# EAGLE board schematic (EAGLE 9.5.1)
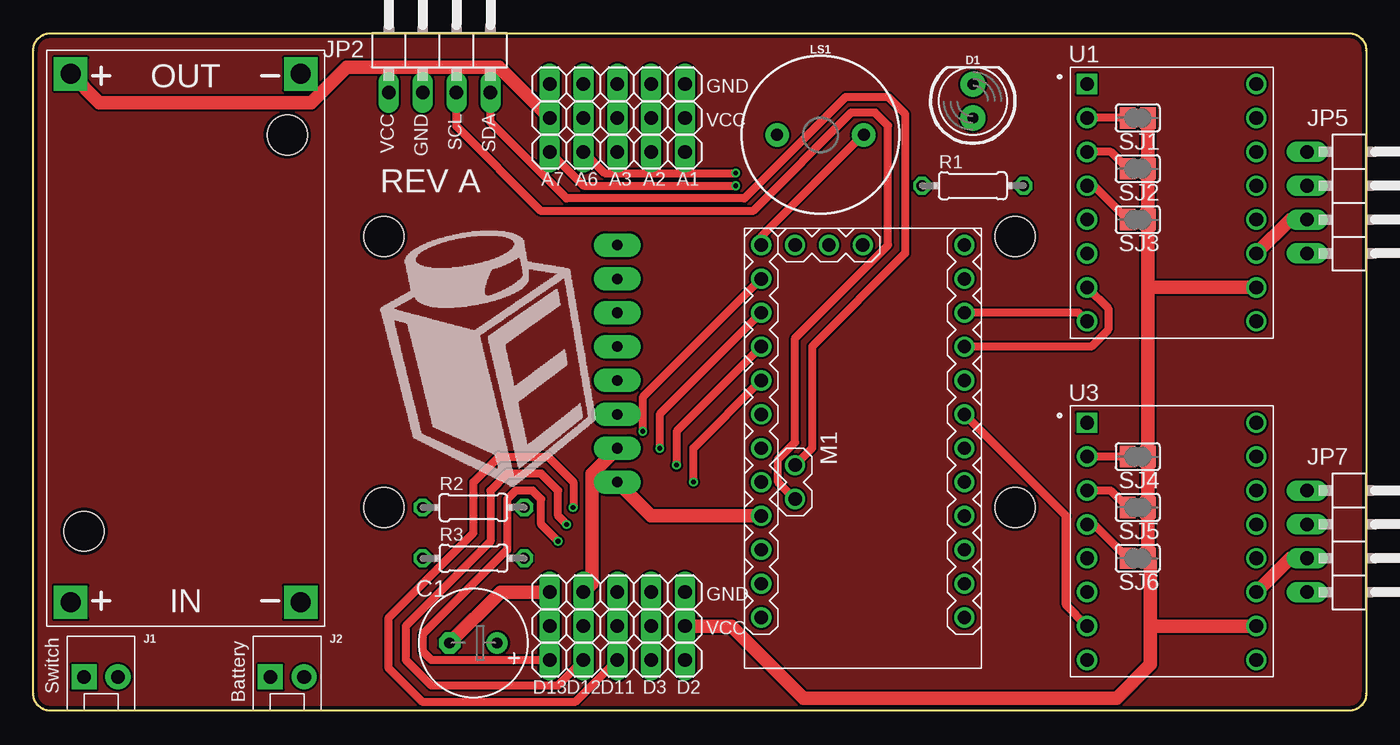
[diagram p0: board, top side]
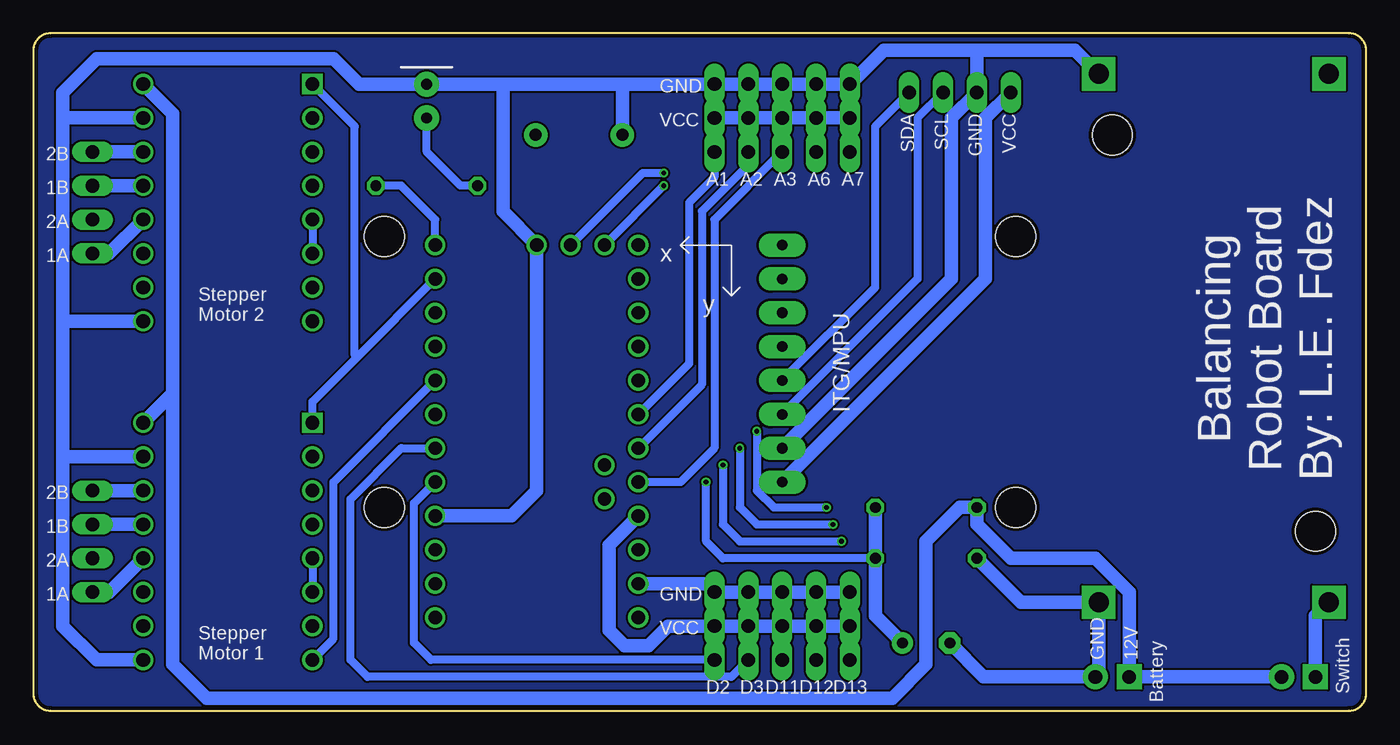
[diagram p1: board, bottom side, seen from below]

Size 100 x 50.8 mm. Coordinates in mm from the lower left corner, seen from the top.
Outline: 98.73,0 1.27,0 arc-90 0,1.27 0,49.53 arc-90 1.27,50.8 98.73,50.8 arc-90 100,49.53 100,1.27 arc-90 98.73,0
Copper layers (1*16): Top 0.035mm / dielectric 1.5mm / Bottom 0.035mm
Design rules "SeeedStudio_2layer_DRU_no_angle_20140221 *": minimum track width 6mil, minimum drill 12mil, track to track 6mil, track to pad 6mil, pad to pad 6mil, via to via 6mil, smd to smd 0mil, copper to edge 10mil, drill to drill 10mil, minimum pad ring 10mil, minimum via ring 6mil, stop-mask expansion 2mil, vias tented up to drill 100mil, thermal gap 10mil
Holes 3 mm at 26.29,35.56 73.66,35.56 26.29,15.24 73.66,15.24

## Footprints (pad centres in the part's own frame; a part is rotated, then mirrored left to right if it is on the bottom)
E3,5-8 = drill 0.813 pad 1.6: + -1.778,0 | drill 0.813 pad 1.6 octagon: - 1.778,0
LED_5MM = drill 0.813 pad 1.88: A -1.27,0; K 1.27,0
MOLEX-1X2 = drill 1.016 pad 1.88 square: 1 0,0 | drill 1.016 pad 1.88: 2 2.54,0
1X05 = drill 1.016 long: 1 -5.08,0; 2 -2.54,0; 3 0,0; 4 2.54,0; 5 5.08,0
1X04/90 = drill 1.016 long: 1 -3.81,-3.81; 2 -1.27,-3.81; 3 1.27,-3.81; 4 3.81,-3.81
BUZZER-12MM = drill 0.9 pad 1.778: + 3.25,0; - -3.25,0
ARDUINO-PRO-MINI#NP = drill 1: J2.1 -1.27,5.08; J2.2 -3.81,5.08; J3.1 15.24,0; J3.2 15.24,2.54; J3.3 15.24,5.08; J6.1 -12.7,7.62; J6.2 -10.16,7.62; J6.3 -7.62,7.62; J6.4 -5.08,7.62; J6.5 -2.54,7.62; J6.6 0,7.62; J6.7 2.54,7.62; J6.8 5.08,7.62; J6.9 7.62,7.62; J6.10 10.16,7.62; J6.11 12.7,7.62; J6.12 15.24,7.62; J7.1 15.24,-7.62; J7.2 12.7,-7.62; J7.3 10.16,-7.62; J7.4 7.62,-7.62; J7.5 5.08,-7.62; J7.6 2.54,-7.62; J7.7 0,-7.62; J7.8 -2.54,-7.62; J7.9 -5.08,-7.62; J7.10 -7.62,-7.62; J7.11 -10.16,-7.62; J7.12 -12.7,-7.62
0204/7 = drill 0.813 octagon: 1 -3.81,0; 2 3.81,0
SJ = smd 1.168 x 1.6: 1 -0.762,0; 2 0.762,0
MODULE_A4988_STEPPER_MOTOR_DRIVER_CARRIER = drill 1.02 square: 1 -6.35,8.89 | drill 1.02: 2 -6.35,6.35; 3 -6.35,3.81; 4 -6.35,1.27; 5 -6.35,-1.27; 6 -6.35,-3.81; 7 -6.35,-6.35; 8 -6.35,-8.89; 9 6.35,-8.89; 10 6.35,-6.35; 11 6.35,-3.81; 12 6.35,-1.27; 13 6.35,1.27; 14 6.35,3.81; 15 6.35,6.35; 16 6.35,8.89
GY-521 = drill 0.8 pad 1.778 long: ADO -8.89,-6.35; GND -8.89,6.35; INT -8.89,-8.89; SCL -8.89,3.81; SDA -8.89,1.27; VCC -8.89,8.89; XCL -8.89,-3.81; XDA -8.89,-1.27
DC-DC-STEP-DOWN-LM2596 = drill 1.5 pad 2.5 square: IN+ -19.812,8.636; IN- -19.812,-8.636; OUT+ 19.812,8.636; OUT- 19.812,-8.636 | hole 3: -14.478,7.62; 15.24,-7.62

## Placement (x,y rotation side)
C1  [E3,5-8]  33.02,5.08 180 top
D1  [LED_5MM]  70.48,45.72 90 top
J1  [MOLEX-1X2]  3.81,2.54 0 top
J2  [MOLEX-1X2]  17.78,2.54 0 top
JP1  [1X05]  43.81,46.99 180 top
JP2  [1X04/90]  30.48,50.16 0 top
JP3  [1X05]  43.81,41.91 180 top
JP4  [1X05]  43.81,44.45 180 top
JP5  [1X04/90]  99.38,38.1 270 top
JP7  [1X04/90]  99.38,12.7 270 top
JP8  [1X05]  43.81,8.89 180 top
JP9  [1X05]  43.81,6.35 180 top
JP10  [1X05]  43.81,3.81 180 top
LS1  BUZZER-PTH  [BUZZER-12MM]  59.05,43.18 0 top
M1  ARDUINO-PRO-MINI-3.3V#NP  [ARDUINO-PRO-MINI#NP]  62.23,19.68 90 top
R1  [0204/7]  70.48,39.37 180 top
R2  [0204/7]  33.02,15.24 0 top
R3  [0204/7]  33.02,11.43 180 top
SJ1  [SJ]  82.87,44.45 180 top
SJ2  [SJ]  82.87,40.64 180 top
SJ3  [SJ]  82.87,36.83 180 top
SJ4  [SJ]  82.87,19.05 180 top
SJ5  [SJ]  82.87,15.24 180 top
SJ6  [SJ]  82.87,11.43 180 top
U1  A4988 STEPPER DRIVER  [MODULE_A4988_STEPPER_MOTOR_DRIVER_CARRIER]  85.41,38.1 0 top
U2  GY-521MPU6050  [GY-521]  52.7,26.04 180 bottom
U3  A4988 STEPPER DRIVER  [MODULE_A4988_STEPPER_MOTOR_DRIVER_CARRIER]  85.41,12.7 0 top
U$1  DC-DC-STEP-DOWN-LM2596  [DC-DC-STEP-DOWN-LM2596]  11.43,27.94 90 top

## Library data of the parts
C1 R1-R3 = resistor
D1 = SparkFun-LED
J1 J2 = SparkFun-Connectors; SF_ID: PRT-09918
JP1-JP5 JP7-JP10 = pinhead
LS1 = SparkFun-Electromechanical; PROD_ID: COMP-08253; SF_SKU: COM-07950
M1 U$1 = diy-modules
SJ1-SJ6 = jumper
U1 U3 = A4988_STEPPER_MOTOR_DRIVER_CARRIER; AVAILABILITY: Unavailable; DESCRIPTION: Stepper motor controler; IC: A4988; 1A; Uin mot: 8÷35V; MF: Pololu; MP: A4988 STEPPER MOTOR DRIVER CARRIER; PACKAGE: None; PRICE: None
U2 = gy-521

## Nets
5V: JP2.1 JP4.1 JP4.2 JP4.3 JP4.4 JP4.5 JP9.1 JP9.2 JP9.3 JP9.4 JP9.5 M1.J6.4 SJ1.1 SJ2.1 SJ3.1 SJ4.1 SJ5.1 SJ6.1 U1.10 U2.VCC U3.10 U$1.OUT+
12V: J1.2 J2.1 R2.1 U1.16 U3.16
A1: JP3.1 M1.J6.7
A2: JP3.2 M1.J6.6
A3: JP3.3 M1.J6.5
A6: JP3.4 M1.J3.2
A7: JP3.5 M1.J3.3
D2: JP10.1 M1.J7.8
D3: JP10.2 M1.J7.7
D11: JP10.3 M1.J6.11
D12: JP10.4 M1.J6.10
D13: JP10.5 M1.J6.9
DIR_1: M1.J7.5 U3.8
DIR_2: M1.J7.3 U1.8
ENA: M1.J7.2 U1.1 U3.1
GND: C1.- D1.K J2.2 JP1.1 JP1.2 JP1.3 JP1.4 JP1.5 JP2.2 JP8.1 JP8.2 JP8.3 JP8.4 JP8.5 LS1.- M1.J3.1 M1.J6.2 M1.J7.9 R3.2 U1.9 U1.15 U2.GND U3.9 U3.15 U$1.IN- U$1.OUT-
N$1: SJ2.2 U1.3
N$2: SJ3.2 U1.4
N$3: SJ1.2 U1.2
N$4: SJ5.2 U3.3
N$5: SJ6.2 U3.4
N$6: SJ4.2 U3.2
N$7: JP5.4 U1.12
N$8: JP5.3 U1.11
N$9: JP7.4 U3.12
N$10: JP7.3 U3.11
N$11: JP7.2 U3.13
N$12: JP7.1 U3.14
N$13: JP5.2 U1.13
N$14: JP5.1 U1.14
N$15: U1.5 U1.6
N$17: J1.1 U$1.IN+
N$18: U3.5 U3.6
N$29: C1.+ M1.J6.8 R2.2 R3.1
N$33: LS1.+ M1.J6.12
N$43: M1.J7.1 R1.1
N$44: D1.A R1.2
RAW: M1.J6.1
SCL: JP2.3 M1.J2.2 U2.SCL
SDA: JP2.4 M1.J2.1 U2.SDA
STEP_1: M1.J7.6 U3.7
STEP_2: M1.J7.4 U1.7

## Tracks (layer width: path | path; a pad name or v marks a point on that pad's centre or on a via)
5V
  Top 1.016: SJ1.1 SJ2.1 SJ3.1 83.63,31.75 | 83.63,31.75 SJ4.1 SJ5.1 SJ6.1 83.82,11.24 83.82,6.35 | U1.10 83.63,31.75 | 83.82,6.35 U3.10 | JP9.1 52.38,6.35 57.78,0.95 81.28,0.95 83.82,3.49 83.82,6.35 | 26.67,48.26 23.5,48.26 20.83,45.59 4.95,45.59 U$1.OUT+ | 26.67,48.26 34.92,48.26 JP4.5 | JP2.1 26.67,48.26 | M1.J6.4 46.35,14.61 U2.VCC
  Bottom 1.016: JP4.5 JP4.4 JP4.3 JP4.2 JP4.1 | JP9.5 JP9.4 JP9.3 JP9.2 JP9.1 52.38,6.35 53.86,4.87 55.65,4.87 56.83,6.04 56.83,12.39 M1.J6.4 | JP2.1 28.57,44.45 28.57,32.38 U2.VCC
12V
  Bottom 1.016: J1.2 J2.1 17.78,8.89 20.32,11.43 26.67,11.43 29.21,13.97 R2.1 30.48,15.24 33.02,12.7 33.02,3.49 35.56,0.95 87,0.95 89.53,3.49 89.53,23.81 | U1.16 89.53,44.77 89.53,23.81 | 89.53,23.81 U3.16
A1
  Bottom 0.61: M1.J6.7 50.8,26.04 50.8,38.1 48.9,40.01 JP3.1
A2
  Bottom 0.61: M1.J6.6 49.85,24.45 49.85,37.47 46.35,40.96 JP3.2
A3
  Bottom 0.61: M1.J6.5 51.44,17.14 48.9,19.68 48.9,36.83 JP3.3
A6  (via drill 0.35)
  Top 0.61: v52.7,40.32 42.86,40.32 JP3.4
  Bottom 0.61: M1.J3.2 54.29,40.32 v52.7,40.32
A7  (via drill 0.35)
  Top 0.61: v52.7,39.37 41.27,39.37 JP3.5
  Bottom 0.61: v52.7,39.37 M1.J3.3
COPPER
  pour Bottom: 100,48 100,1.27 arc-90 98.73,0 1.27,0 arc-90 0,1.27 0,48 0,49.53 arc-90 1.27,50.8 3.81,50.8 98.73,50.8 arc-90 100,49.53
  pour Top: 100,49 100,1.27 arc-90 98.73,0 1.27,0 arc-90 0,1.27 0,49.47 arc-45 0.37,50.37 0.43,50.43 arc-45 1.33,50.8 3.81,50.8 98.73,50.8 arc-90 100,49.53
D2
  Bottom 0.61: M1.J7.8 71.44,15.56 71.44,5.08 70.17,3.81 JP10.1
D3
  Bottom 0.61: JP10.2 47.62,2.54 74.93,2.54 76.2,3.81 76.2,15.88 72.39,19.68 M1.J7.7
D11  (via drill 0.35)
  Top 0.61: M1.J6.11 45.72,23.5 v45.72,20.95 | JP10.3 40.64,0.64 29.21,0.64 26.67,3.17 26.67,6.99 33.02,13.34 33.02,17.14 34.92,19.05 38.61,19.05 40.51,17.14 40.51,15.26 v40.49,15.24
  Bottom 0.61: v45.72,20.95 45.72,16.51 44.45,15.24 41.27,15.24 40.64,15.24 v40.49,15.24
D12  (via drill 0.35)
  Top 0.61: M1.J6.10 46.99,22.23 v46.99,19.68 | v40.01,13.97 39.37,14.61 39.37,16.51 38.1,17.78 35.56,17.78 34.29,16.51 34.29,12.7 27.94,6.35 27.94,3.81 29.84,1.91 39.37,1.91 JP10.4
  Bottom 0.61: v46.99,19.68 46.99,15.24 45.72,13.97 v40.01,13.97
D13  (via drill 0.35)
  Top 0.61: M1.J6.9 48.26,20.95 v48.26,18.41 | v39.37,12.7 38.1,13.97 38.1,15.88 37.47,16.51 36.2,16.51 35.56,15.88 35.56,12.06 29.21,5.71 29.21,4.45 29.84,3.81 JP10.5
  Bottom 0.61: v48.26,18.41 48.26,13.97 46.99,12.7 v39.37,12.7
DIR_1
  Bottom 0.61: M1.J7.5 77.47,17.14 77.47,5.4 U3.8
DIR_2
  Top 0.61: M1.J7.3 78.42,29.84 U1.8
ENA
  Bottom 0.61: 75.72,26.51 79.06,23.18 U3.1 | 75.72,26.51 M1.J7.2 | U1.1 75.88,43.81 75.88,26.67 75.72,26.51
GND
  Top 1.016: C1.- 35.05,8.89 JP8.5 | U2.GND 41.91,17.78 41.91,9.53 JP8.4
  Bottom 1.016: JP8.5 JP8.4 JP8.3 JP8.2 JP8.1 49.53,9.53 M1.J6.2 | C1.- 28.7,2.54 J2.2 20.07,2.79 U$1.IN- 25.91,8.13 R3.2 | U$1.OUT- 21.84,49.53 29.21,49.53 | 29.21,49.53 36.2,49.53 JP1.5 JP1.4 JP1.3 JP1.2 JP1.1 55.88,46.99 | 55.88,46.99 64.77,46.99 | 64.77,46.99 D1.K 75.56,46.99 77.47,48.9 95.25,48.9 97.79,46.35 97.79,44.45 | LS1.- 55.8,46.91 55.88,46.99 | U3.9 95.25,3.81 97.79,6.35 97.79,19.05 | 97.79,19.05 97.79,29.21 | 97.79,29.21 97.79,44.45 | 97.79,44.45 U1.15 | U3.15 97.79,19.05 | U1.9 97.79,29.21 | 64.77,46.99 64.77,37.47 M1.J3.1 62.23,16.51 64.14,14.61 M1.J7.9 | U2.GND 31.11,32.38 31.11,44.45 JP2.2 29.21,49.53
N$1
  Top 0.61: SJ2.2 80.83,41.91 U1.3
N$2
  Top 0.61: SJ3.2 79.57,39.37 U1.4
N$3
  Top 0.61: SJ1.2 U1.2
N$4
  Top 0.61: SJ5.2 80.83,16.51 U3.3
N$5
  Top 0.61: SJ6.2 79.57,13.97 U3.4
N$6
  Top 0.61: SJ4.2 U3.2
N$7
  Bottom 1.016: JP5.4 94.3,34.29 U1.12
N$8
  Top 1.016: JP5.3 94.3,36.83 U1.11
N$9
  Bottom 1.016: JP7.4 94.3,8.89 U3.12
N$10
  Top 1.016: JP7.3 94.3,11.43 U3.11
N$11
  Bottom 1.016: JP7.2 U3.13
N$12
  Bottom 1.016: U3.14 JP7.1
N$13
  Bottom 1.016: U1.13 JP5.2
N$14
  Bottom 1.016: JP5.1 U1.14
N$15
  Bottom 0.61: U1.5 U1.6
N$17
  Bottom 1.016: U$1.IN+ 3.81,7.11 J1.1
N$18
  Bottom 0.61: U3.5 U3.6
N$29  (via drill 0.35)
  Top 0.61: v49.53,17.14 49.53,19.68 M1.J6.8
  Bottom 0.61: R3.1 48.26,11.43 49.53,12.7 v49.53,17.14
  Bottom 1.016: C1.+ 36.83,7.11 R3.1 R2.2
N$33
  Top 0.61: M1.J6.12 54.61,35.56 62.23,43.18 LS1.+
N$43
  Bottom 0.61: M1.J7.1 69.85,36.83 72.39,39.37 R1.1
N$44
  Bottom 0.61: R1.2 67.94,39.37 70.48,41.91 D1.A
SCL
  Top 0.61: M1.J2.2 55.88,17.14 55.88,18.86 57.15,20.13 57.15,27.94 64.14,34.92 64.14,43.87 63.16,44.85 61.36,44.85 53.98,37.47 38.1,37.47 31.75,43.81 JP2.3
  Bottom 0.61: JP2.3 33.66,44.45 33.66,32.38 U2.SCL
SDA
  Top 0.61: M1.J2.1 58.42,19.68 58.42,27.3 65.41,34.29 65.41,44.77 64.14,46.04 60.96,46.04 53.34,38.42 40.01,38.42 34.29,44.13 JP2.4
  Bottom 0.61: U2.SDA 36.83,31.75 36.83,43.81 JP2.4
STEP_1
  Top 0.61: M1.J7.6 77.47,14.61 77.47,7.94 U3.7
STEP_2
  Top 0.61: M1.J7.4 79.38,27.3 80.64,28.57 80.64,30.16 U1.7

## Text on the board
tPlace: GND | VCC | GND | SCL | SDA | VCC | REV A | A7 | A6 | A3 | A2 | A1 | GND | VCC | Switch | Battery | D13 | D12 | D11 | D3 | D2
bPlace: GND | VCC | GND | SCL | SDA | VCC | 2B | A7 | A6 | A3 | A2 | A1 | 1B | 2A | 1A | Stepper / Motor 2 | By: L.E. Fdez | Balancing / Robot Board | 2B | 1B | 2A | GND | 1A | VCC | 12V | GND | Stepper / Motor 1 | Switch | Battery | D13 | D12 | D11 | D3 | D2